# Altium PCB ModuloMQTT.PcbDoc
Units mm, origin at the board's own origin, x right, y up, seen from the top; angles counter-clockwise.
Board outline 37.5 x 30 mm, 2 copper layers (Top Layer, Bottom Layer); 13 components, 11 nets, 50 pads, 0 vias.
Unrouted connection lines stored in the file: 8.
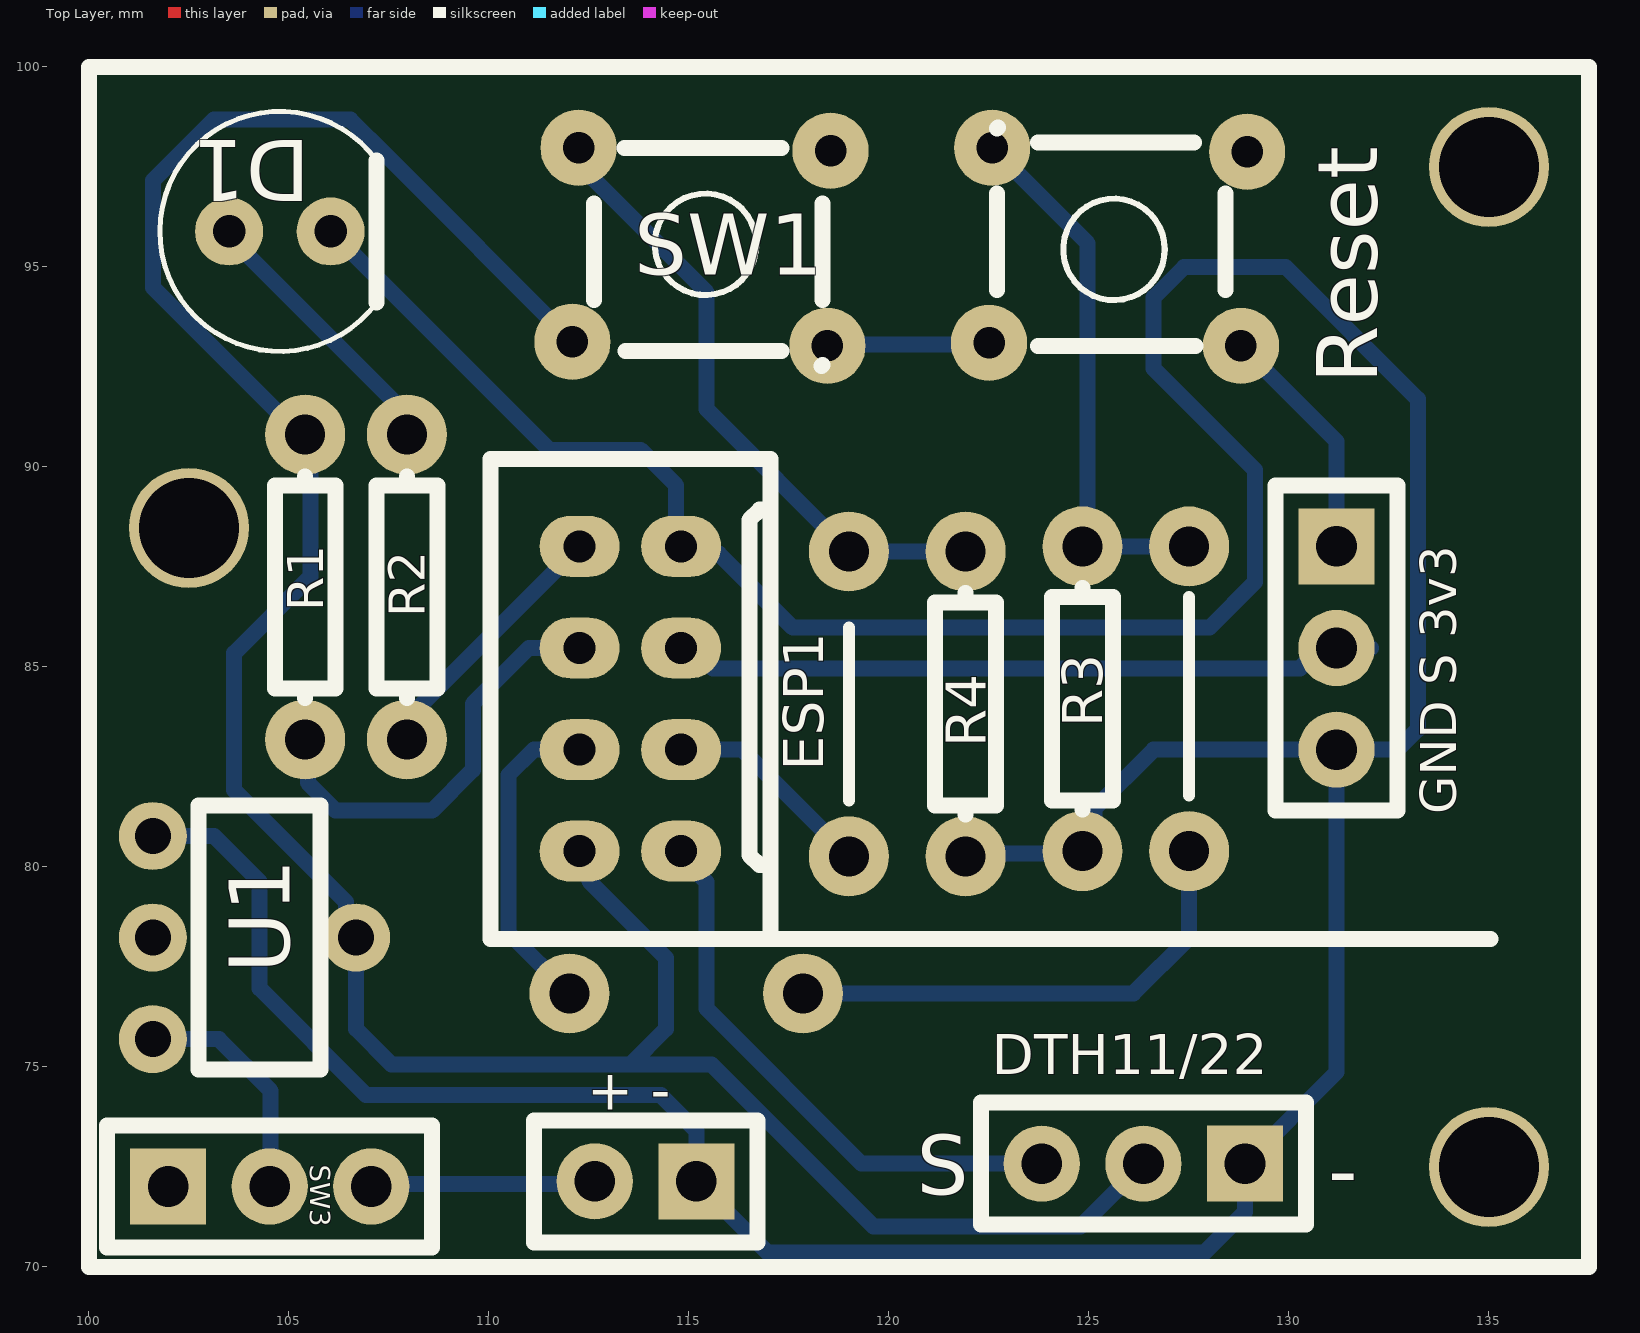
[diagram p0: Top Layer view]
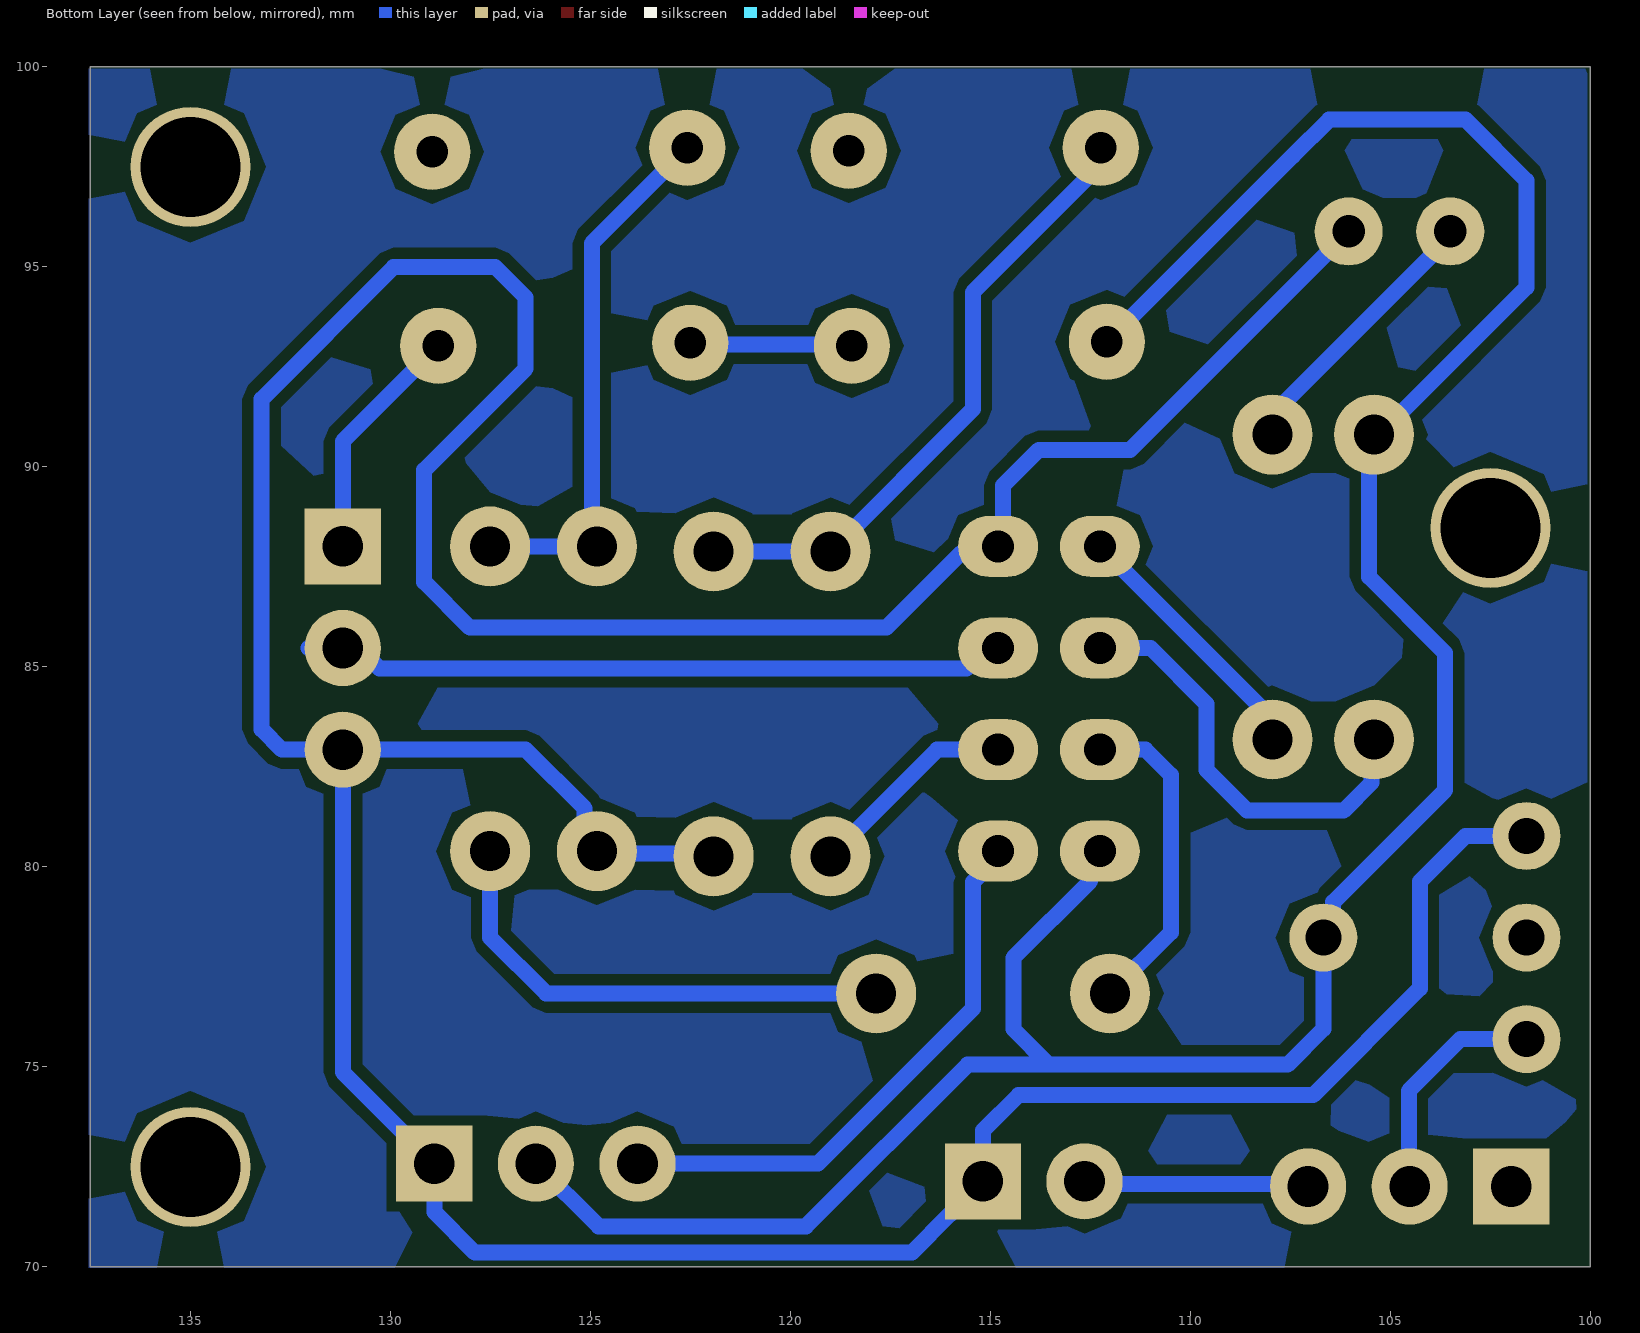
[diagram p1: Bottom Layer view, seen from below]
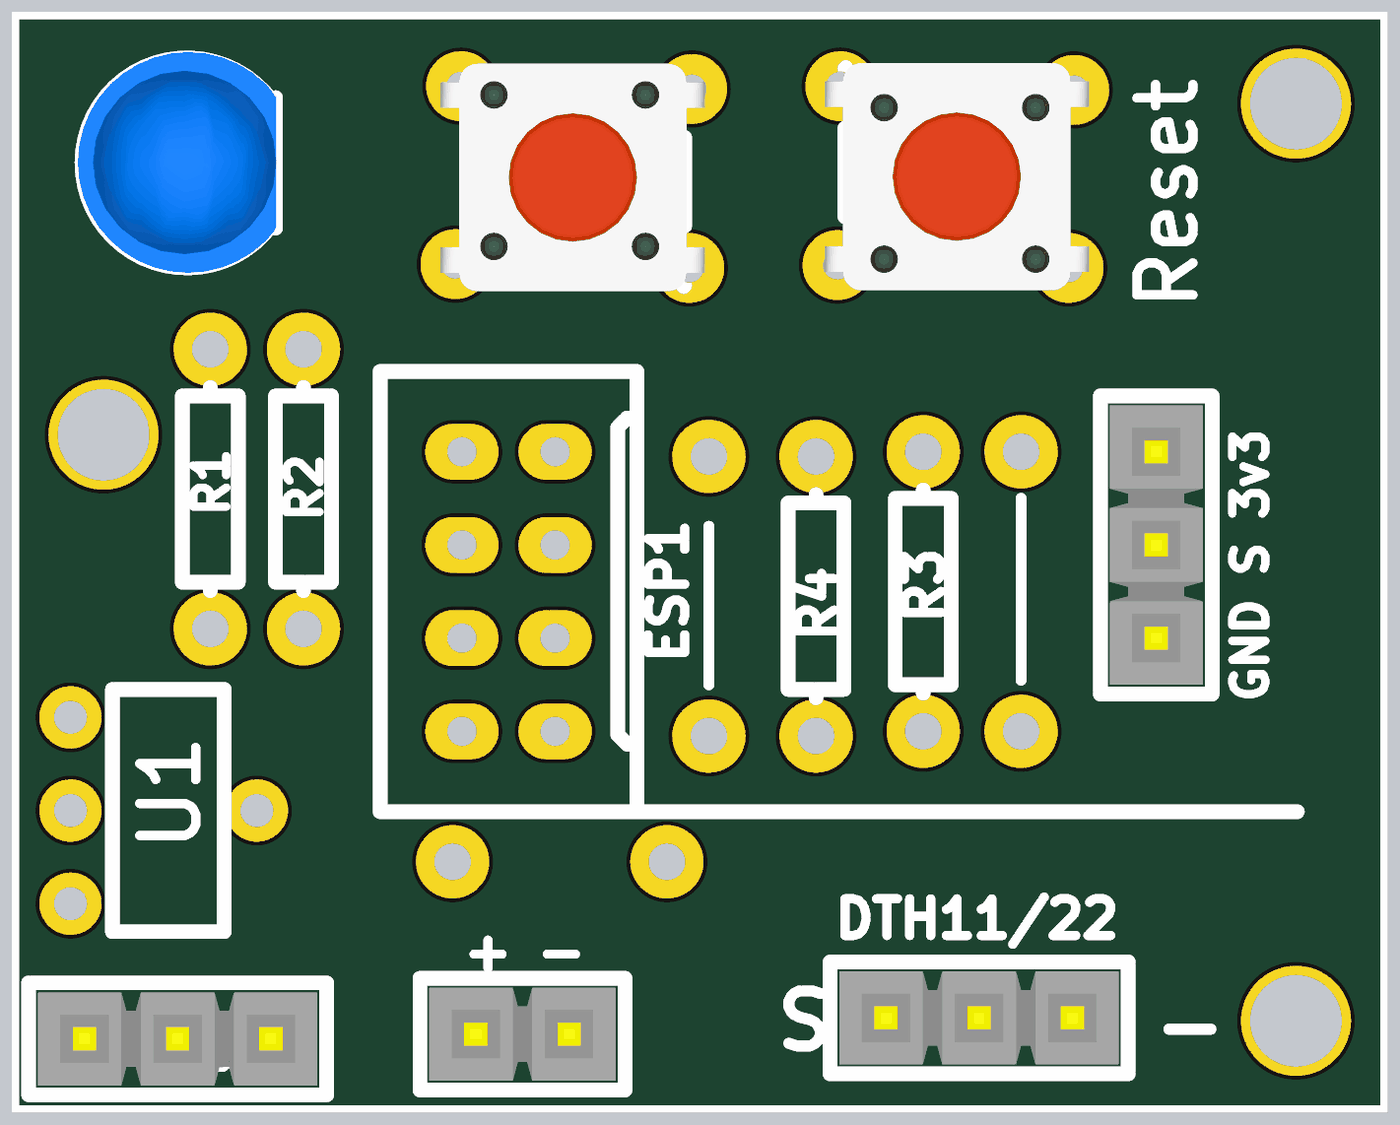
[diagram p2: 3D render of the assembled board from above, using the file's embedded part models]

## Layer stack, top to bottom
Top Solder: solder mask 0.0102, Solder Resist, Dk 3.5
Top Layer: signal copper 0.0356
Dielectric 1: dielectric 0.32, FR-4, Dk 4.8
Bottom Layer: signal copper 0.0356
Bottom Solder: solder mask 0.0102, Solder Resist, Dk 3.5

## Board outline
100,70 100,100 137.5,100 137.5,70

## Design rules (kind name [scope] priority, off if disabled: settings)
Clearance [All] p1: gap=0.254 ignorepadtopadclearanceinfootprint=FALSE except(0: Arc-Hole Track-Hole SMDPad-Hole THPad-Hole Via-Hole Fill-Hole Poly-Hole Region-Hole Text-Hole)
PolygonConnect [All] p1: connectstyle=Relief reliefconductorwidth=0.254 reliefentries=4 polygonreliefangle="90 Angle" airgapwidth=2
RoutingVias [All] p1: holewidth=0.711 width=1.27 viastyle="Through Hole" minholewidth=0.711 minwidth=1.27 maxholewidth=0.711 maxwidth=1.27
SolderMaskExpansion [All] p1: expansion=0.102 istentingtop=FALSE
Width [All] p1: maxlimit=2 minlimit=0.254 preferedwidth=0.254 toplayer_maxwidth=0.254 minimp=50.000000 maximp=50.000000 favimp=50.000000
30 further rules are at their usual default settings.

## Classes and differential pairs
component class ModuloMQTT: "+ -" D1 DTH11/22 ESP1 "GND S 3v3" R1 R2 R3 R4 Reset SW3 U1

## Components (designator, comment, footprint, x,y, rotation, side; value= is the part's Value field where it differs from the comment)
"+ -" "Header 2" "Header 2" 115.189,72.136 r180 top (schematic designator P1)
D1 "LED" "LED-0 5mm BLUE" 104.775,95.885 r90 top
DTH11/22 "DHT11/22" "Header 3" 128.905,72.581 r180 top (schematic designator S1)
ESP1 "ESP" ESP 112.268,88.011 r270 top
"GND S 3v3" "Header 3" "Header 3" 131.191,88.011 r270 top (schematic designator P3)
R1 "Res1" AXIAL-0.3 105.41,86.995 r270 top value=1K
R2 "Res1" AXIAL-0.3 107.95,86.995 r90 top value=330
R3 "Res1" AXIAL-0.3 124.841,84.201 r90 top value=10K
R4 "Res1" AXIAL-0.3 121.92,84.074 r90 top value=10K
Reset "SW" SW4 125.73,95.5 r180 top value="Button chip 4 pin" (schematic designator SW2)
SW1 "SW" SW4 115.316,95.5 r0 top value="Button chip 4 pin"
SW3 "SW3" "Header 3" 101.981,72.009 r0 top (schematic designator SW1)
U1 "AMS1117" AMS1117_No_SMD 106.68,78.232 r270 top

## Footprints (in the part's own frame and the unit in brackets; to place one, negate y for a bottom-side part, rotate by r counter-clockwise, add the part's x,y. Pads: shape width x height; smd on the part's side, far side on the other; paste and mask are expansions set on the pad)
AMS1117_No_SMD [mm]
  round 1.7 hole 0.9: 1(-2.54,-5.08) 2(0,0) 2(0,-5.08) 3(2.54,-5.08)
  silkscreen extent -3.3,-3.94 3.3,-0.89
AXIAL-0.3 [mm] "Axial Device, Thru-Hole; 2 Leads; 0.3 in Pin Spacing"
  round 2 hole 1: 1(-3.81,0) 2(3.81,0)
  silkscreen extent -2.77,-0.76 2.77,0.76
ESP [mm]
  oval 1.524x2 hole 0.8: 1(0,0) 2(2.54,0) 3(5.08,0) 4(7.62,0) 5(7.62,2.54) 6(5.08,2.54) 7(2.54,2.54) 8(0,2.54)
  silkscreen extent -2.19,-2.23 9.81,4.77
"Header 2" [mil] "Connector; Header; 2 Position; Solder Pad 35mil"
  rect 75x75 hole 40: 1(0,0)
  round 75 hole 40: 2(100,0)
  silkscreen extent -60,-60 160,60, body extent -50,-50 150,50, height 330
"Header 3" [mil] "Connector; Header; 3 Position; Solder Pad 35mil"
  rect 75x75 hole 40: 1(0,0)
  round 75 hole 40: 2(100,0) 3(200,0)
  silkscreen extent -60,-60 260,60, body extent -50,-50 250,50, height 83
"LED-0 5mm BLUE" [mil] "Typical LED; BLUE; 2 Leads; Solder Pad 35mil"
  round 67 hole 32: 1(0,50) 2(0,-50)
  silkscreen extent -118,-96 118,118, body extent -118,-96 119,117, height 345
SW4 [mil] "SW button 4pin, 250 x250 mil"
  round 75 hole 31: 1(-121,97.5) 2(124,-97.5) 3(127,94.5) 4(-127,-93.5)
  silkscreen extent -106,-117 119,98, body extent -157,-123 155,122, height 276

## Part data
"+ -": "Header, 2-Pin", LatestRevisionDate=17-Jul-2002, LatestRevisionNote="Re-released for DXP Platform.", Publisher="Altium Limited"
D1: "Typical LED", LatestRevisionDate=08-Jul-2005, LatestRevisionNote="Mech Layer 1 removed.", PackageReference=LED-1, Published=8-Jun-2000, Publisher="Altium Limited"
"GND S 3v3": "Header, 3-Pin", LatestRevisionDate=17-Jul-2002, LatestRevisionNote="Re-released for DXP Platform.", Publisher="Altium Limited"
R1 R2 R3 R4: "Resistor", LatestRevisionDate=17-Jul-2002, LatestRevisionNote="Re-released for DXP Platform.", PackageDescription="Axial Device, Thru-Hole; 2 Leads; 0.3 in Pin Spacing", PackageReference=AXIAL-0.3, Published=8-Jun-2000, Publisher="Altium Limited"
Reset SW1: library part SW4, "Switch button 4 pin"
U1: "Regulator SMD Chip", ComponentLink1Description="Digikey Part Link", ComponentLink2Description="Open Datasheet", ComponentLink2URL=H:\LIBRARY\LIBRARY.Datasheet\, Published=13-April-2009, Publisher="Hoang Nguyen", Vendor=Digikey

## Free pads (board coordinates)
  round 3 hole 2.5: 5(102.5,88.476) 5(135,72.5) 5(135,97.5)
  round 2 hole 1: 6(127.508,88.011) 7(112.014,76.835) 7(117.856,76.835) 7(127.508,80.391) 8(118.999,87.884) 9(118.999,80.264)

## Nets (pads, with @x,y where several pads share a name; then routed paths per layer and width w, separated by ;. In a path a pad name is that pad's centre, name@x,y a point inside that pad or via, vN(x,y) a via of type N, cw(c..) or ccw(c..) an arc to the next point about the centre after c; other vN are vias at no path point)
3v3: "GND S 3v3.1" DTH11/22.2 ESP1.4 R1.1 Reset.1 Reset.3 SW1.2 SW1.4 U1.2 | length 77.4
  Bottom Layer w0.4: SW1.4 107.442,97.773 106.536,98.679 103.124,98.679 101.6,97.155 101.6,94.488 105.537,90.551 105.537,87.249 103.632,85.344 103.632,81.915 106.431,79.116 106.431,78.481 106.68,78.232 106.68,75.946 107.569,75.057 113.538,75.057 ; ESP1.4 112.511,80.148 112.511,79.64 114.427,77.724 114.427,75.946 113.538,75.057 ; SW1.2 118.504,93.062 122.466,93.062 Reset.3 ; DTH11/22.2 124.796,71.012 119.615,71.012 115.57,75.057 113.538,75.057 ; Reset.1 131.191,90.636 131.191,88.011
GND: "+ -.1" "GND S 3v3.3" D1.2 DTH11/22.1 ESP1.8 R3.1 R4.1 U1.1 | length 113.2
  Bottom Layer w0.4: U1.1 103.124,80.772 104.267,79.629 104.267,76.962 106.934,74.295 114.3,74.295 115.189,73.406 115.189,72.136 116.014,71.31 116.967,70.358 127.889,70.358 128.905,71.374 DTH11/22.1 131.191,74.867 131.191,82.931 ; D1.2 111.506,90.424 113.792,90.424 114.681,89.535 114.681,88.138 114.99,87.829 115.752,87.829 117.602,85.979 128.016,85.979 129.159,87.122 129.159,89.916 126.619,92.456 126.619,94.234 127.381,94.996 129.921,94.996 133.223,91.694 133.223,83.439 132.715,82.931 131.191,82.931 ; R4.1 121.983,80.328 R3.1@124.904,80.328 ; R3.1 125.147,80.697 125.147,81.459 126.619,82.931 131.191,82.931
NetD1_1: D1.1 R2.2 | length 6.9
  Bottom Layer w0.4: D1.1 103.505,95.758 107.644,91.619 107.644,91.111 R2.2
NetESP1_1: ESP1.1 R2.1 | length 6.6
  Bottom Layer w0.4: R2.1 108.169,83.404 108.169,83.912 ESP1.1
NetESP1_2: ESP1.2 R1.2 | length 10.8
  Bottom Layer w0.4: R1.2 105.475,83.12 105.475,82.104 106.172,81.407 108.585,81.407 109.601,82.423 109.601,84.074 110.998,85.471 ESP1.2
NetESP1_3: ESP1.3 pad.6 pad.7 R3.2 Reset.2 Reset.4 | length 34
  Bottom Layer w0.4: pad.7@112.014,76.835 110.49,78.359 110.49,82.296 111.125,82.931 ESP1.3 ; pad.7@117.99,76.835 126.111,76.835 127.508,78.232 pad.7@127.508,80.391 ; Reset.2 124.968,95.589 R3.2@124.968,88.011 ; R3.2 R3.2@124.968,88.011 ; pad.6 R3.2@124.968,88.011
NetESP1_5: DTH11/22.3 ESP1.5 | length 14.2
  Bottom Layer w0.4: ESP1.5 114.808,80.255 115.443,79.62 115.443,76.454 119.316,72.581 DTH11/22.3
NetESP1_6: ESP1.6 pad.8 pad.9 R4.2 SW1.1 SW1.3 | length 20.9
  Bottom Layer w0.4: SW1.1 112.243,97.561 115.443,94.361 115.443,91.44 pad.8 ; ESP1.6 116.332,82.931 pad.9 ; pad.8@119.316,88.201 119.634,87.884 R4.2
NetESP1_7: "GND S 3v3.2" ESP1.7 | length 17.7
  Bottom Layer w0.4: ESP1.7 115.096,85.471 115.604,84.963 130.276,84.963 130.784,85.471 132.049,85.471
NetP1_2: "+ -.2" SW3.3 | length 5.6
  Bottom Layer w0.4: SW3.3 107.124,72.072 112.585,72.072 112.649,72.136
NetSW1_2: SW3.2 U1.3 | length 5.9
  Bottom Layer w0.4: U1.3 103.251,75.692 104.543,74.4 104.543,72.031 SW3.2
pads on no net: SW3.1

## Polygon pours and split planes (outlines as drawn)
no net on Top Overlay "NONET_L02_P-001" (solid): 100.076,70.231
no net on Bottom Layer "NONET_L02_P000" (solid, pour order 0): 137.541,69.977 137.541,99.949 99.949,99.949 100.076,99.822 100.076,69.977

## Silkscreen, mask and mechanical layers (free items; w line width, h text height)
Top Overlay:
  lines w0.3: 118.999,81.661 118.999,85.979 ; 127.508,81.788 127.508,86.741
  lines w0.4: 110.038,78.201 135.038,78.201 ; 137.414,70 100,70 100,100 137.414,100 ; 137.5,70 137.5,100
  text "S" at 120.696,71.801 h1.5
  text "-" at 130.983,71.686 h1.5